# EAGLE board imote1 (EAGLE 6.4)
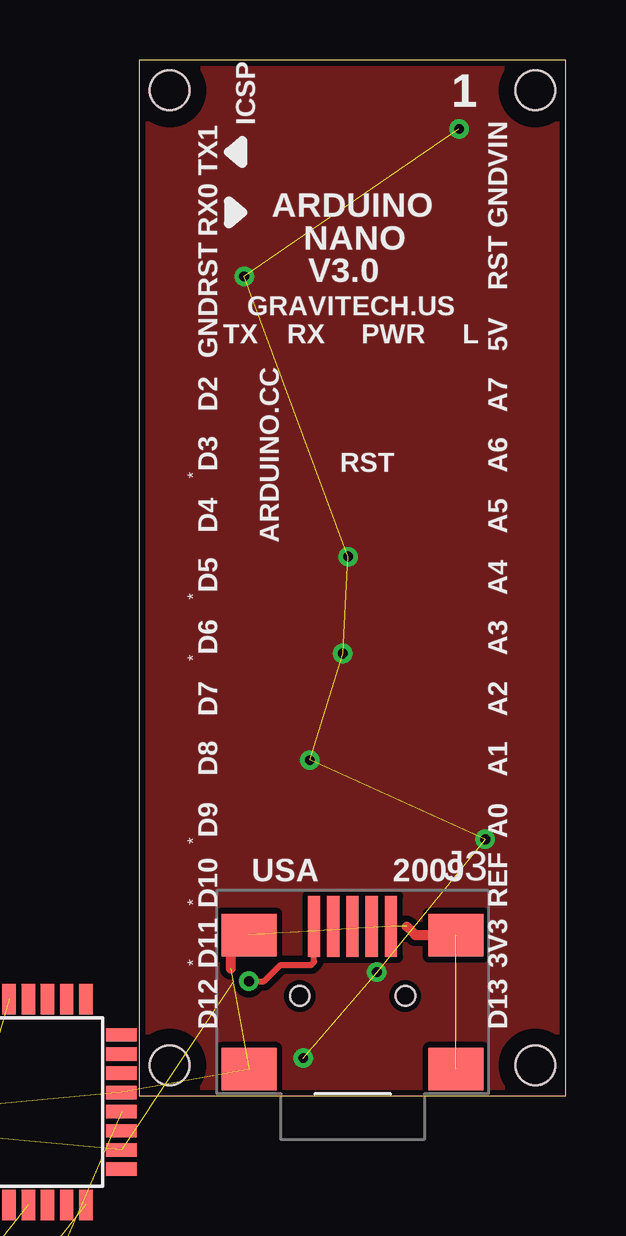
[diagram p0: board, top side]
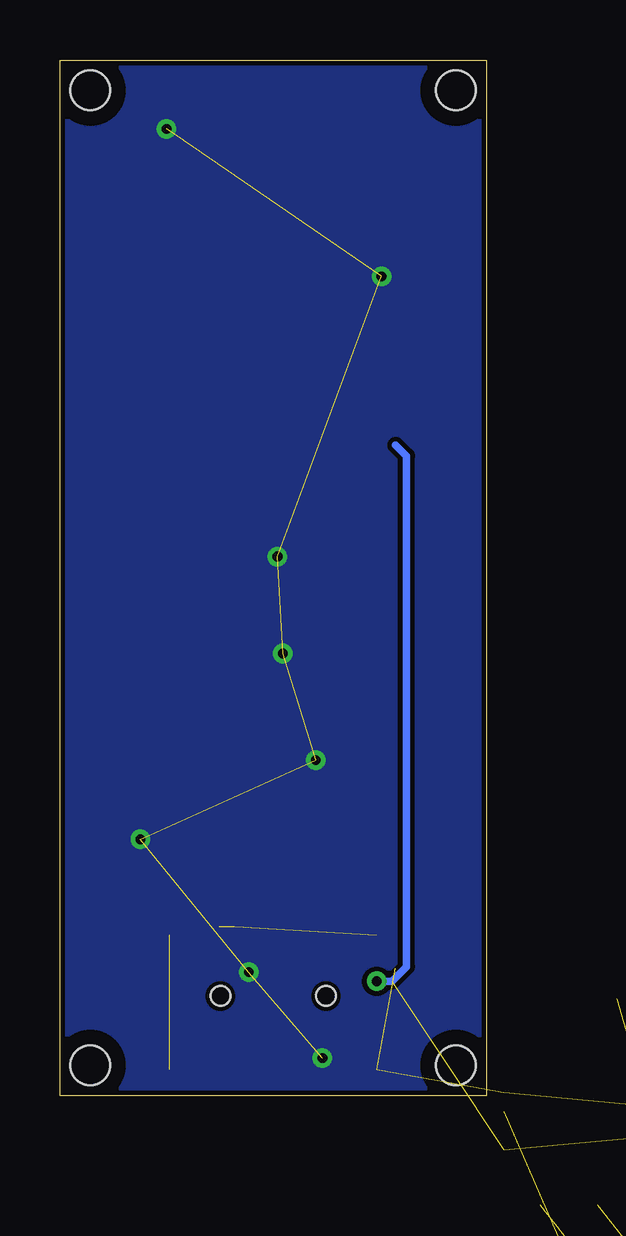
[diagram p1: board, bottom side, seen from below]

Size 17.78 x 43.18 mm. Coordinates in mm from the lower left corner, seen from the top.
Outline: 0,0 17.78,0 17.78,43.18 0,43.18 0,0
Copper layers (1*16): Top 0.035mm / dielectric 1.5mm / Bottom 0.035mm
Design rules "default *": minimum track width 8mil, minimum drill 16mil, track to track 8mil, track to pad 8mil, pad to pad 8mil, via to via 8mil, smd to smd 8mil, copper to edge 8mil, drill to drill 8mil, minimum pad ring 12mil, minimum via ring 8mil, stop-mask expansion 4mil, vias tented up to drill 18mil, thermal gap 10mil
Holes 1.65 mm at 1.27,1.27 16.51,1.27 16.51,41.91 1.27,41.91
tRestrict: area 0.1,0.1 to 2.4,2.4; area 15.4,40.8 to 17.7,43.1; area 15.4,0.1 to 17.7,2.4; area 0.1,40.8 to 2.4,43.1
bRestrict: area 15.4,0.1 to 17.7,2.4; area 0.1,0.1 to 2.4,2.4; area 0.1,40.8 to 2.4,43.1; area 15.4,40.8 to 17.7,43.1

## Footprints (pad centres in the part's own frame; a part is rotated, then mirrored left to right if it is on the bottom)
C2012 = smd 1.3 x 1.5: 1 -0.85,0; 2 0.85,0
E2,5-5 = drill 0.813 pad 1.6: + -1.27,0 | drill 0.813 pad 1.6 octagon: - 1.27,0
TQFP32-08 = smd 1.27 x 0.559: 1 -4.293,2.8; 2 -4.293,2; 3 -4.293,1.2; 4 -4.293,0.4; 5 -4.293,-0.4; 6 -4.293,-1.2; 7 -4.293,-2; 8 -4.293,-2.8; 17 4.293,-2.8; 18 4.293,-2; 19 4.293,-1.2; 20 4.293,-0.4; 21 4.293,0.4; 22 4.293,1.2; 23 4.293,2; 24 4.293,2.8 | smd 0.559 x 1.27: 9 -2.8,-4.293; 10 -2,-4.293; 11 -1.2,-4.293; 12 -0.4,-4.293; 13 0.4,-4.293; 14 1.2,-4.293; 15 2,-4.293; 16 2.8,-4.293; 25 2.8,4.293; 26 2,4.293; 27 1.2,4.293; 28 0.4,4.293; 29 -0.4,4.293; 30 -1.2,4.293; 31 -2,4.293; 32 -2.8,4.293
USB-MINI-B_2 = smd 0.508 x 2.54: 1 0,0; 2 0.8,0; 3 1.6,0; 4 2.4,0; 5 3.2,0 | smd 2.286 x 1.778: 6 -2.717,5.948; 7 -2.717,0.36; 8 5.918,0.36; 9 5.918,5.948 | hole 0.813: -0.6,2.9; 3.8,2.9
2X03 = drill 1.016 octagon: 1 -2.54,-1.27; 2 -2.54,1.27; 3 0,-1.27; 4 0,1.27; 5 2.54,-1.27; 6 2.54,1.27
CHIP-LED0805 = smd 1.2 x 1.2: A 0,-1.05; C 0,1.05
QS = drill 0.61 long: 1 -2.54,0; 2 2.54,0
R2012 = smd 1.3 x 1.5: 1 -0.85,0; 2 0.85,0
B3F-10XX = drill 1.016 long: 1 -3.251,2.261; 2 3.251,2.261; 3 -3.251,-2.261; 4 3.251,-2.261
TO92-ECB = drill 0.813 long: B 2.54,0; C 0,0; E -2.54,0

## Placement (x,y rotation side)
C1  0.1uF  [C2012]  -18.67,-46.08 0 top  (outside the outline)
C3  10uF  [E2,5-5]  -18.06,-52.1 0 top  (outside the outline)
C4  22pF  [C2012]  -18.67,-30.05 0 top  (outside the outline)
C5  22pF  [C2012]  -18.67,-34.04 0 top  (outside the outline)
C6  0.1uF  [C2012]  -18.67,-40.06 0 top  (outside the outline)
IC1  ATmega328P-AU  [TQFP32-08]  -5.03,-0.25 0 top
J3  USB-MINI-B%C  [USB-MINI-B_2]  10.49,7.06 180 top
JP1  [2X03]  -36.6,-50.06 0 top  (outside the outline)
LED1  [CHIP-LED0805]  -23.72,-53.24 0 top  (outside the outline)
LED2  [CHIP-LED0805]  -29.74,-53.24 0 top  (outside the outline)
Q1  16MHz  [QS]  -14.88,-22.63 0 top  (outside the outline)
R1  1K  [R2012]  -8.05,-8 0 top  (outside the outline)
R2  330  [R2012]  -8.05,-11.73 0 top  (outside the outline)
R3  330  [R2012]  -8.05,-15.47 0 top  (outside the outline)
RB  4.7k  [R2012]  -47.37,-57.73 0 top  (outside the outline)
RC  47  [R2012]  -53.39,-68.76 0 top  (outside the outline)
S1  B3F-1000  [B3F-10XX]  -15.37,-12.67 0 top  (outside the outline)
T1  2SC1815  [TO92-ECB]  -45.82,-51.21 0 top  (outside the outline)
TODO-IRLED1\  [CHIP-LED0805]  -52.45,-64.26 0 top  (outside the outline)

## Library data of the parts
C1 C3-C6 = rcl
IC1 = Arduino-AVR
J3 = MyCON2
JP1 = pinhead
LED1 LED2 TODO-IRLED1\ = led
Q1 = special
R1-R3 RB RC = resistor
S1 = switch-omron; MPN: B3F-1000; OC_FARNELL: 176432; OC_NEWARK: 36M3542
T1 = transistor

## Nets
!RESET: IC1.29 R1.1 S1.1 S1.2
+5V: C1.1 C3.+ IC1.4 IC1.6 IC1.18 J3.5 JP1.2 R1.2 R3.1 TODO-IRLED1\.A
AREF: C6.2 IC1.20
D0/RX: IC1.30
D1/TX: IC1.31
D3/IRIN: IC1.1
D9/IROUT: IC1.13 RB.2
D11/MOSI: IC1.15
D12/MISO: IC1.16 JP1.1
D13/SCK: R2.2
GND: C1.2 C3.- C4.1 C5.1 C6.1 IC1.3 IC1.5 IC1.21 J3.1 J3.6 J3.7 J3.8 J3.9 JP1.6 LED1.C LED2.C S1.3 S1.4 T1.E
N$1: C4.2 IC1.8 Q1.1
N$2: C5.2 IC1.7 Q1.2
N$3: LED1.A R3.2
N$4: IC1.17
N$6: JP1.3
N$7: LED2.A R2.1
N$8: JP1.5
N$9: JP1.4
N$10: RB.1 T1.B
N$11: RC.1 T1.C
N$12: RC.2 TODO-IRLED1\.C

## Tracks (layer width: path | path; a pad name or v marks a point on that pad's centre or on a via)
!RESET  (3 unrouted)
+5V  (via drill 0.41 pad 0.81)  (9 unrouted)
  Top 0.254: J3.5 7.29,5.59 7.16,5.46 5.89,5.46 5.21,4.78 v4.57,4.78
  Bottom 0.305: v4.57,4.78 3.94,4.78 3.33,5.38 3.33,26.67 3.79,27.13
AREF  (1 unrouted)
COM  (via drill 0.41, 0.41 pad 0.81)  (7 unrouted)
  other vias: 13.34,40.31 6.83,1.57 9.91,5.16 14.43,10.69 8.48,18.44 8.71,22.48 7.11,14 4.37,34.16
  pour Top (isolate 0.254): 0.25,0.25 0.25,42.93 17.53,42.93 17.53,0.25
  pour Bottom (isolate 0.203): 0.25,0.25 0.25,42.93 17.53,42.93 17.53,0.25
D9/IROUT  (1 unrouted)
D12/MISO  (1 unrouted)
GND  (18 unrouted)
  Top 0.406: 11.15,7.06 11.51,6.71 J3.7 | J3.8 3.81,6.7 3.81,5.31
N$1  (2 unrouted)
N$2  (2 unrouted)
N$3  (1 unrouted)
N$7  (1 unrouted)
N$10  (1 unrouted)
N$11  (1 unrouted)
N$12  (1 unrouted)

## Text on the board
tPlace: 1 | ICSP | VIN | TX1 | ARDUINO | RX0 | GND | NANO | V3.0 | RST | RST | GRAVITECH.US | GND | TX | RX | PWR | L | 5V | D2 | A7 | * | D3 | RST | A6 | D4 | ARDUINO.CC | A5 | * | D5 | A4 | * | D6 | A3 | D7 | A2 | D8 | A1 | D9 | A0 | * | USA | 2009 | * | D10 | REF | * | D11 | 3V3 | D12 | D13